# EAGLE board V0 (EAGLE 9.4.0), part 1 of 2
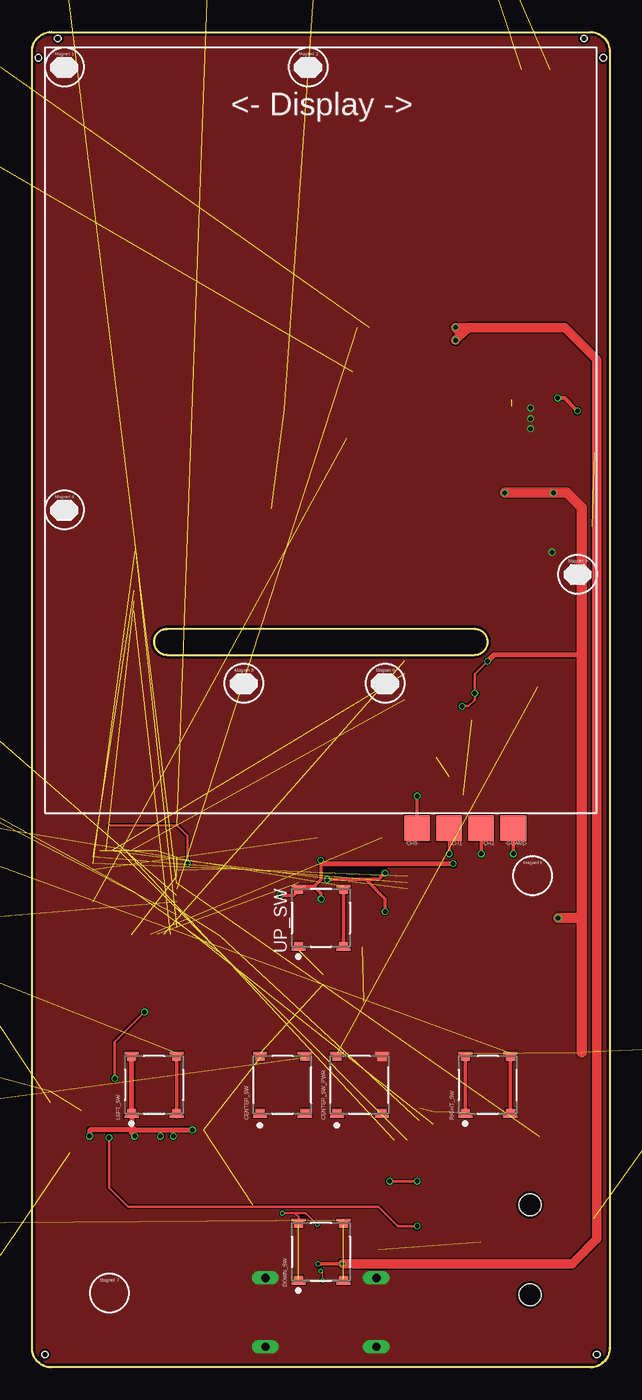
[diagram p0: board, top side]
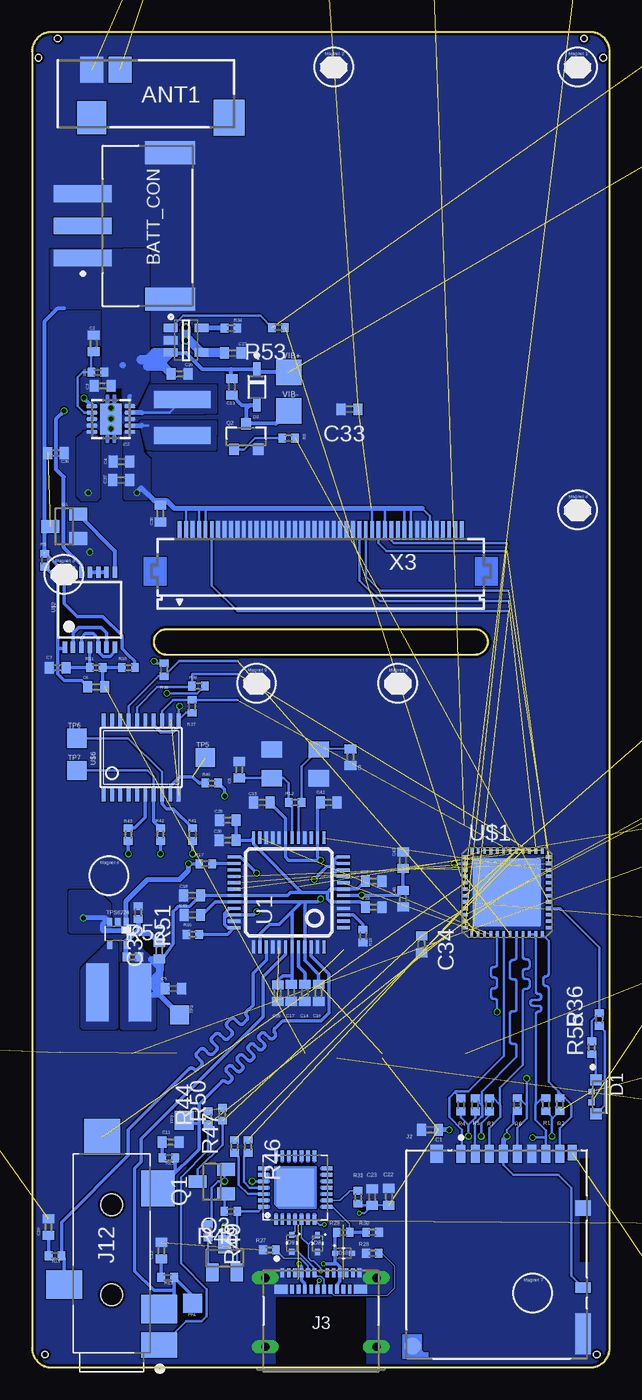
[diagram p1: board, bottom side, seen from below]

Size 45 x 104 mm. Coordinates in mm from the lower left corner, seen from the top.
Outline: 43.5,104 arc-90 45,102.5 45,1.5 arc-90 43.5,0 1.5,0 arc-90 0,1.5 0,102.5 arc-90 1.5,104 43.5,104
Outline: 10.5,55.5 34.5,55.5 arc90 35.5,56.5 arc90 34.5,57.5 10.5,57.5 arc90 9.5,56.5 arc90 10.5,55.5
Copper layers (1*16): Top 0.035mm / dielectric 1.5mm / Bottom 0.035mm
Design rules "jlcpcb": minimum track width 3.5mil, minimum drill 0.2mm, track to track 3.5mil, track to pad 3.5mil, pad to pad 6mil, via to via 6mil, smd to smd 6mil, copper to edge 0.2mm, drill to drill 0.2mm, minimum pad ring 3mil, minimum via ring 3mil, stop-mask expansion 4mil, vias tented up to drill 0mil, thermal gap 10mil
Holes 0.5 mm at 44,1 1,1 0.5,102 44.5,102 2,103.5 43,103.5

## Footprints (pad centres in the part's own frame; a part is rotated, then mirrored left to right if it is on the bottom)
PRO-OB-440_1 = smd 2 x 1.8: 1 1.865,-2.65; 2 1.865,-4.85 | smd 2.6 x 2.25: 3 -1.865,-2.65 | smd 2.8 x 2.45: 4 -1.865,-13.35
JST_S3B-XH-SM4-TB_0 = smd 1.3 x 4.5: 1 -2.5,5.05; 2 0,5.05; 3 2.5,5.05 | smd 1.8 x 3.9: 4 -5.7,-1.75; 5 5.7,-1.75
C0402 = smd 0.7 x 0.9: 1 -0.65,0; 2 0.65,0
C0201 = smd 0.25 x 0.35: 1 -0.25,0; 2 0.25,0
E-SWITCH_TL3315NF100Q_0 = smd 0.5 x 0.7: 1 -2.125,1.75; 2 2.125,1.75; 3 -2.125,-1.75; 4 2.125,-1.75 | smd 0.2 x 1.1: 1-2 -2.475,1.75; 2-2 2.475,1.75; 3-2 -2.475,-1.75; 4-2 2.475,-1.75
TP20SQ = smd 2 x 2: TP 0,0
BROADCOM_HSMF-C113_0 = smd 0.85 x 0.9: 1 -1.325,-0.25; 4 1.325,-0.25 | smd 0.45 x 0.5: 2 -0.425,-0.6; 3 0.425,-0.6
ON_SEMI_1N914BWS_0 = smd 1.05 x 0.55: 1 -1.4,0; 2 1.4,0
SOD-523 = smd 0.8 x 0.6: A 0,-0.8; K 0,0.8
ON_SEMICONDUCTOR_ESD5Z5.0T1G_0 = smd 0.48 x 0.4: 1 -0.66,0; 2 0.66,0
E-SWITCH_TL3315NF160Q_0 = smd 0.5 x 0.7: 1 -2.125,1.75; 2 2.125,1.75; 3 -2.125,-1.75; 4 2.125,-1.75 | smd 0.2 x 1.1: 1-2 -2.475,1.75; 2-2 2.475,1.75; 3-2 -2.475,-1.75; 4-2 2.475,-1.75
SOT23 = smd 1 x 1.4: 1 -0.95,-1.1; 2 0.95,-1.1; 3 0,1.1
DRC-S-PVSON-N10 = smd 0.28 x 0.85: 1 -1,-1.475; 2 -0.5,-1.475; 3 0,-1.475; 4 0.5,-1.475; 5 1,-1.475; 6 1,1.475; 7 0.5,1.475; 8 0,1.475; 9 -0.5,1.475; 10 -1,1.475 | smd 2.4 x 1.65: TH 0,0
HIROSE_DM3BT-DSF-PEJS_0 = smd 0.7 x 1.4: 1 -2.775,7.825; 2 -1.675,7.825; 3 -0.575,7.825; 4 0.525,7.825; 5 1.625,7.825; 6 2.725,7.825; 7 3.825,7.825; 8 4.925,7.825 | smd 0.7 x 1.2: 9 5.875,7.925 | smd 1.2 x 0.8: 10 6.725,-2.575 | smd 1 x 1.4: 11 -4.675,7.825 | smd 1.2 x 1.2: 12 6.725,3.625 | smd 1.311 x 1.311: 13 -6.553,-7.116 | smd 1.2 x 3.2: 14 6.725,-6.175
MOLEX_105450-0101_0 = drill 0.635 pad 1.067 long: 1 -4.32,3.36; 2 4.32,3.36; 3 -4.32,-2; 4 4.32,-2 | smd 0.3 x 0.7: A1 -3,3.77; A2 -2.5,3.77; A3 -2,3.77; A4 -1.5,3.77; A5 -1,3.77; A6 -0.5,3.77; A7 0.5,3.77; A8 1,3.77; A9 1.5,3.77; A10 2,3.77; A11 2.5,3.77; A12 3,3.77; B2 2.25,2.47; B3 1.75,2.47; B4 1.25,2.47; B5 0.75,2.47; B6 0.25,2.47; B7 -0.25,2.47; B8 -0.75,2.47; B9 -1.25,2.47; B10 -1.75,2.47; B11 -2.25,2.47 | smd 1 x 0.7: B1 3.1,2.47; B12 -3.1,2.47
CUI_SJ-43515TS-SMT = smd 2 x 2.8: 1 -7.15,-3.7 | smd 2.8 x 2.6: 2 5.05,-3.6 | smd 2.2 x 2.8: 3 -2.45,3.7; 4 -4.35,-3.7 | smd 2.8 x 2.8: 5 9.05,0.75 | hole 1.7: -3.25,0; 3.75,0
QFN28 = smd 2.9 x 2.9: P$0 0,0 | smd 0.8 x 0.3: P$1 -2.5,1.5; P$2 -2.5,1; P$3 -2.5,0.5; P$4 -2.5,0; P$5 -2.5,-0.5; P$6 -2.5,-1; P$7 -2.5,-1.5; P$15 2.5,-1.5; P$16 2.5,-1; P$17 2.5,-0.5; P$18 2.5,0; P$19 2.5,0.5; P$20 2.5,1; P$21 2.5,1.5 | smd 0.3 x 0.8: P$8 -1.5,-2.5; P$9 -1,-2.5; P$10 -0.5,-2.5; P$11 0,-2.5; P$12 0.5,-2.5; P$13 1,-2.5; P$14 1.5,-2.5; P$22 1.5,2.5; P$23 1,2.5; P$24 0.5,2.5; P$25 0,2.5; P$26 -0.5,2.5; P$27 -1,2.5; P$31 -1.5,2.5
ON_SEMI_MMBT5551LT1G_0 = smd 0.9 x 0.8: 1 -1,0.95; 2 -1,-0.95; 3 1,0
R0402 = smd 0.6 x 0.7: 1 -0.5,0; 2 0.5,0
TP15SQ = smd 1.5 x 1.5: TP 0,0
TSP62240 = smd 0.4 x 0.7: 1 -0.65,-0.85; 2 0,-0.85; 3 0.65,-0.85; 4 0.65,0.85; 5 -0.65,0.85
LQFP48 = smd 0.25 x 1: 1 -2.75,-4.25; 2 -2.25,-4.25; 3 -1.75,-4.25; 4 -1.25,-4.25; 5 -0.75,-4.25; 6 -0.25,-4.25; 7 0.25,-4.25; 8 0.75,-4.25; 9 1.25,-4.25; 10 1.75,-4.25; 11 2.25,-4.25; 12 2.75,-4.25; 25 2.75,4.25; 26 2.25,4.25; 27 1.75,4.25; 28 1.25,4.25; 29 0.75,4.25; 30 0.25,4.25; 31 -0.25,4.25; 32 -0.75,4.25; 33 -1.25,4.25; 34 -1.75,4.25; 35 -2.25,4.25; 36 -2.75,4.25 | smd 1 x 0.25: 13 4.25,-2.75; 14 4.25,-2.25; 15 4.25,-1.75; 16 4.25,-1.25; 17 4.25,-0.75; 18 4.25,-0.25; 19 4.25,0.25; 20 4.25,0.75; 21 4.25,1.25; 22 4.25,1.75; 23 4.25,2.25; 24 4.25,2.75; 37 -4.25,2.75; 38 -4.25,2.25; 39 -4.25,1.75; 40 -4.25,1.25; 41 -4.25,0.75; 42 -4.25,0.25; 43 -4.25,-0.25; 44 -4.25,-0.75; 45 -4.25,-1.25; 46 -4.25,-1.75; 47 -4.25,-2.25; 48 -4.25,-2.75
MICROCHIP_MCP73831T-2ATI-OT_1 = smd 1.1 x 0.65: 1 -1.2,0.95; 2 -1.2,0; 3 -1.2,-0.95; 4 1.2,-0.95; 5 1.2,0.95
QFN48 = smd 0.55 x 0.3: 1 -3.275,2.75; 2 -3.275,2.25; 3 -3.275,1.75; 4 -3.275,1.25; 5 -3.275,0.75; 6 -3.275,0.25; 7 -3.275,-0.25; 8 -3.275,-0.75; 9 -3.275,-1.25; 10 -3.275,-1.75; 11 -3.275,-2.25; 12 -3.275,-2.75; 25 3.275,-2.75; 26 3.275,-2.25; 27 3.275,-1.75; 28 3.275,-1.25; 29 3.275,-0.75; 30 3.275,-0.25; 31 3.275,0.25; 32 3.275,0.75; 33 3.275,1.25; 34 3.275,1.75; 35 3.275,2.25; 36 3.275,2.75 | smd 0.3 x 0.55: 13 -2.75,-3.275; 14 -2.25,-3.275; 15 -1.75,-3.275; 16 -1.25,-3.275; 17 -0.75,-3.275; 18 -0.25,-3.275; 19 0.25,-3.275; 20 0.75,-3.275; 21 1.25,-3.275; 22 1.75,-3.275; 23 2.25,-3.275; 24 2.75,-3.275; 37 2.75,3.275; 38 2.25,3.275; 39 1.75,3.275; 40 1.25,3.275; 41 0.75,3.275; 42 0.25,3.275; 43 -0.25,3.275; 44 -0.75,3.275; 45 -1.25,3.275; 46 -1.75,3.275; 47 -2.25,3.275; 48 -2.75,3.275 | smd 5.309 x 5.309: EXP 0,0
TSSOP14 = smd 0.35 x 0.9: 1 -1.95,-2.925; 2 -1.3,-2.925; 3 -0.65,-2.925; 4 0,-2.925; 5 0.65,-2.925; 6 1.3,-2.925; 7 1.95,-2.925; 8 1.95,2.925; 9 1.3,2.925; 10 0.65,2.925; 11 0,2.925; 12 -0.65,2.925; 13 -1.3,2.925; 14 -1.95,2.925
INDUCTOR = smd 1.3 x 4.4: P$1 -1.5,0.2; P$2 1.3,0.2
ECSCRYSTAL = smd 1.6 x 1.25: GND -1.83,1.12; GND2 1.84,-1.11; IN/OUT 1.82,1.12; IN/OUT2 -1.83,-1.11
INDUCTOR' = smd 1.75 x 4.5: P$1 -1.4,0.2; P$2 1.9,0.2
TSSOP20 = smd 0.305 x 0.991: 1 -2.925,-2.918; 2 -2.275,-2.918; 3 -1.625,-2.918; 4 -0.975,-2.918; 5 -0.325,-2.918; 6 0.325,-2.918; 7 0.975,-2.918; 8 1.625,-2.918; 9 2.275,-2.918; 10 2.925,-2.918; 11 2.925,2.918; 12 2.275,2.918; 13 1.625,2.918; 14 0.975,2.918; 15 0.325,2.918; 16 -0.325,2.918; 17 -0.975,2.918; 18 -1.625,2.918; 19 -2.275,2.918; 20 -2.925,2.918
FH12-45S-0.5SH = smd 0.3 x 1.3: 1 -13,3.25; 2 -12.5,3.25; 3 -12,3.25; 4 -11.5,3.25; 5 -11,3.25; 6 -10.5,3.25; 7 -10,3.25; 8 -9.5,3.25; 9 -9,3.25; 10 -8.5,3.25; 11 -8,3.25; 12 -7.5,3.25; 13 -7,3.25; 14 -6.5,3.25; 15 -6,3.25; 16 -5.5,3.25; 17 -5,3.25; 18 -4.5,3.25; 19 -4,3.25; 20 -3.5,3.25; 21 -3,3.25; 22 -2.5,3.25; 23 -2,3.25; 24 -1.5,3.25; 25 -1,3.25; 26 -0.5,3.25; 27 0,3.25; 28 0.5,3.25; 29 1,3.25; 30 1.5,3.25; 31 2,3.25; 32 2.5,3.25; 33 3,3.25; 34 3.5,3.25; 35 4,3.25; 36 4.5,3.25; 37 5,3.25; 38 5.5,3.25; 39 6,3.25; 40 6.5,3.25; 41 7,3.25; 42 7.5,3.25; 43 8,3.25; 44 8.5,3.25; 45 9,3.25

## Placement (x,y rotation side)
ANT1  PRO-OB-440  [PRO-OB-440_1]  43,99.2 90 bottom
BATT_CON  JST_S3B-XH-SM4-TBJST_S3B-XH-SM4-TB_0_0  [JST_S3B-XH-SM4-TB_0]  36,88.91 90 bottom
C1  50uF  [C0402]  14,18.5 180 bottom
C2  .1uF  [C0402]  40.2,79.75 90 bottom
C3  10uF  [C0402]  39.5,76.44 180 bottom
C4  10uF  [C0402]  38.04,70.55 180 bottom
C5  10 uF  [C0402]  34,29.5 0 bottom
C6  1uF  [C0402]  40,53 180 bottom
C7  1uF  [C0402]  43,54.5 0 bottom
C8  33pF  [C0402]  28.86,46.54 270 bottom
C9  33pF  [C0402]  20.19,47.53 90 bottom
C10  10nF  [C0402]  43.73,10.92 90 bottom
C11  10nF  [C0402]  34.21,17.54 0 bottom
C12  47nF  [C0402]  34.93,9.09 90 bottom
C13  0.1 uF  [C0402]  29.43,76.36 270 bottom
C14  1uF  [C0402]  23.74,29.17 270 bottom
C15  100nF  [C0402]  27.1,44 180 bottom
C16  100nF  [C0402]  22.68,29.17 270 bottom
C17  100nF  [C0402]  24.8,29.17 270 bottom
C18  100nF  [C0402]  32.53,36.76 180 bottom
C19  100nF  [C0402]  18.38,35.85 0 bottom
C20  100nF  [C0402]  18.38,37.87 0 bottom
C21  0.1uF  [C0402]  -38.5,32 180 top  (outside the outline)
C22  4.7uF  [C0402]  17.2,13.28 90 bottom
C23  0.1uF  [C0402]  18.5,13.27 90 bottom
C24  4.7uF  [C0402]  -146.5,167 90 top  (outside the outline)
C25  0.1uF  [C0402]  -138.5,167 90 top  (outside the outline)
C26  4.7uF  [C0402]  33.5,77.39 0 bottom
C27  4.7uF  [C0402]  29.36,79 0 bottom
C28  10uF  [C0402]  29.76,42.61 180 bottom
C29  10uF  [C0402]  25.87,29.16 270 bottom
C30  2.7pF  [C0201]  11.5,158 90 top  (outside the outline)
C31  4.7pF  [C0201]  15.5,158 90 top  (outside the outline)
C32  10uF  [C0402]  53.98,25 0 bottom  (outside the outline)
C33  0.1uF  [C0402]  20.27,74.63 180 bottom
C34  0.1uF  [C0402]  14.66,32.94 270 bottom
C35  33pF  [C0402]  35.09,32.45 90 bottom
C36  100nF  [C0402]  43.15,71.21 0 bottom
C37  10uF  [C0402]  38.06,69.11 180 bottom
C38  0.1uF  [C0402]  35,66.5 270 bottom
C39  100nF  [C0402]  29.77,41.06 180 bottom
C40  100nF  [C0402]  16.1,36.5 270 bottom
C41  100nF  [C0402]  32.52,35.24 180 bottom
C42  100nF  [C0402]  21.89,44 0 bottom
C43  10uF  [C0402]  16.1,39.5 90 bottom
CENTER_SW  E-SWITCH_TL3315NF100QE-SWITCH_TL3315NF100Q_0_0  [E-SWITCH_TL3315NF100Q_0]  19.5,22 90 top
CENTER_SW_PWR  E-SWITCH_TL3315NF100QE-SWITCH_TL3315NF100Q_0_0  [E-SWITCH_TL3315NF100Q_0]  25.5,22 90 top
CH0  TPSQTP20SQ  [TP20SQ]  30,42 180 top
CH1  TPSQTP20SQ  [TP20SQ]  32.5,42 180 top
CH2  TPSQTP20SQ  [TP20SQ]  35,42 180 top
D1  BROADCOM_HSMF-C113BROADCOM_HSMF-C113_0_0  [BROADCOM_HSMF-C113_0]  0.81,21.06 270 bottom
D2  ON_SEMI_1N914BWSON_SEMI_1N914BWS_0_0  [ON_SEMI_1N914BWS_0]  27.49,76.36 270 bottom
D3  [SOD-523]  -37.5,43 180 top  (outside the outline)
D4  [SOD-523]  -37.5,47 180 top  (outside the outline)
D5  [SOD-523]  -37.5,51 180 top  (outside the outline)
D6  [SOD-523]  -37.5,55 180 top  (outside the outline)
D7  [SOD-523]  -37.5,59 180 top  (outside the outline)
D8  ON_SEMICONDUCTOR_ESD5Z5.0T1GON_SEMICONDUCTOR_ESD5Z5.0T1G_0_0  [ON_SEMICONDUCTOR_ESD5Z5.0T1G_0]  22.76,9.65 270 bottom
D9  ON_SEMICONDUCTOR_ESD5Z5.0T1GON_SEMICONDUCTOR_ESD5Z5.0T1G_0_0  [ON_SEMICONDUCTOR_ESD5Z5.0T1G_0]  24.77,9.67 270 bottom
D10  ON_SEMICONDUCTOR_ESD5Z5.0T1GON_SEMICONDUCTOR_ESD5Z5.0T1G_0_0  [ON_SEMICONDUCTOR_ESD5Z5.0T1G_0]  20.74,8.89 0 bottom
DOWN_SW  E-SWITCH_TL3315NF160QE-SWITCH_TL3315NF160Q_0_0  [E-SWITCH_TL3315NF160Q_0]  22.5,9 90 top
G1  APX809S-31SA  [SOT23]  42.5,65.5 90 bottom
GUARD  TPSQTP20SQ  [TP20SQ]  37.5,42 180 top
IC2  TPS6300  [DRC-S-PVSON-N10]  38.86,73.86 90 bottom
J2  HIROSE_DM3BT-DSF-PEJSHIROSE_DM3BT-DSF-PEJS_0_0  [HIROSE_DM3BT-DSF-PEJS_0]  8.8,8.8 0 bottom
J3  MOLEX_105450-0101MOLEX_105450-0101_0_0  [MOLEX_105450-0101_0]  22.5,3.6 0 bottom
J12  3.5mm TRRS Jack  [CUI_SJ-43515TS-SMT]  38.8,8.9 90 bottom
JL  CP2102N-A02-GQFN28  [QFN28]  24.5,14 90 bottom
LEFT_SW  E-SWITCH_TL3315NF160QE-SWITCH_TL3315NF160Q_0_0  [E-SWITCH_TL3315NF160Q_0]  9.5,22 90 top
Q1  [SOT23]  30.99,14.47 90 bottom
Q2  ON_SEMI_MMBT5551LT1GON_SEMI_MMBT5551LT1G_0_0  [ON_SEMI_MMBT5551LT1G_0]  28.32,72.5 90 bottom
Q3  [SOT23]  30,8.5 0 bottom
R1  10k  [R0402]  4.98,20.47 270 bottom
R2  10k  [R0402]  3.88,20.48 270 bottom
R3  100  [R0402]  39.88,77.5 0 bottom
R4  10k  [R0402]  11.57,20.45 270 bottom
R5  10k  [R0402]  10.47,20.45 270 bottom
R6  10k  [R0402]  7.19,20.48 270 bottom
R7  10k  [R0402]  9.38,20.45 270 bottom
R8  1.5K  [R0402]  25.01,72.38 180 bottom
R9  100k  [R0402]  44,62.87 90 bottom
R10  100k  [R0402]  37.5,54.5 0 bottom
R11  10M  [R0402]  40,54.5 180 bottom
R12  1M  [R0402]  24.5,44 0 bottom
R13  10  [R0402]  34.44,7 180 bottom
R14  20  [R0402]  43.21,8.7 180 bottom
R15  20  [R0402]  34.35,16.33 180 bottom
R16  100K  [R0402]  32.49,33.74 0 bottom
R17  100k  [R0402]  31.47,39.23 180 bottom
R18  100k  [R0402]  19.2,33.6 90 bottom
R19  155k  [R0402]  -38.5,-4 180 top  (outside the outline)
R20  75k  [R0402]  -38.5,1 180 top  (outside the outline)
R21  35k  [R0402]  -46.5,14.5 180 bottom  (outside the outline)
R22  15k  [R0402]  -38.5,11 180 top  (outside the outline)
R23  5k  [R0402]  -38.5,16 180 top  (outside the outline)
R24  50k  [R0402]  -38.5,28 180 top  (outside the outline)
R25  5k  [R0402]  -8,45.5 180 top  (outside the outline)
R26  10k  [R0402]  -38.5,23 180 top  (outside the outline)
R27  5.1k  [R0402]  26.51,9.14 180 bottom
R28  5.1k  [R0402]  18.49,8.88 180 bottom
R29  22.1k  [R0402]  20.76,10.51 180 bottom
R30  47.5k  [R0402]  18.47,10.53 180 bottom
R31  1k  [R0402]  19.59,13.25 270 bottom
R32  10k  [R0402]  -130,159.5 90 top  (outside the outline)
R33  5k  [R0402]  -126.5,165 90 top  (outside the outline)
R34  2k  [R0402]  29.5,80.94 0 bottom
R35  100  [R0402]  -93.5,165 90 top  (outside the outline)
R36  50  [R0402]  0.8,27.1 90 bottom
R37  4.7k  [R0402]  32.53,51.49 270 bottom
R38  4.7k  [R0402]  32.05,53.08 0 bottom
R39  4.7k  [R0402]  34.72,54.34 90 bottom
R40  10k  [R0402]  31,45.5 0 bottom
R41  10k  [R0402]  32.5,41.5 270 bottom
R42  10k  [R0402]  35,41.5 270 bottom
R43  10k  [R0402]  37.5,41.5 270 bottom
R44  10K  [R0402]  31.27,19.44 90 bottom
R45  50k  [R0402]  -3.5,159 90 top  (outside the outline)
R46  1k  [R0402]  28.18,17.21 270 bottom
R47  1k  [R0402]  29.22,17.21 90 bottom
R48  10k  [R0402]  29.51,12.14 180 bottom
R49  10k  [R0402]  31.3,10.64 270 bottom
R50  10k  [R0402]  30.17,19.72 90 bottom
R51  180k  [R0402]  36.73,35.43 270 bottom
R52  360k  [R0402]  37.16,31.96 0 bottom
R53  10k  [R0402]  25.8,81 180 bottom
R54  315k  [R0402]  -24.5,-23 0 top  (outside the outline)
R55  25  [R0402]  1.4,24.9 90 bottom
RIGHT_SW  E-SWITCH_TL3315NF160QE-SWITCH_TL3315NF160Q_0_0  [E-SWITCH_TL3315NF160Q_0]  35.5,22 90 top
TP1  TPSQTP15SQ  [TP15SQ]  25.5,158 90 top  (outside the outline)
TP2  TPSQTP15SQ  [TP15SQ]  33.5,27.45 270 bottom
TP3  TPSQTP15SQ  [TP15SQ]  33.16,19.24 90 bottom
TP4  TPSQTP15SQ  [TP15SQ]  32.5,5 180 bottom
TP5  TPSQTP15SQ  [TP15SQ]  31.5,47.5 0 bottom
TP6  TPSQTP15SQ  [TP15SQ]  41.5,49 0 bottom
TP7  TPSQTP15SQ  [TP15SQ]  41.5,46.5 0 bottom
TPS6224  TPS62240  [TSP62240]  38.31,33.81 180 bottom
U1  VS1053-L  [LQFP48]  25,37 90 bottom
U2  MICROCHIP_MCP73831T-2ATI-OTMICROCHIP_MCP73831T-2ATI-OT_0_1  [MICROCHIP_MCP73831T-2ATI-OT_1]  33,80 0 bottom
U$1  ESP32-PICO-D4  [QFN48]  8,37 0 bottom
U$2  TOSHIBA-NAND-GATE  [TSSOP14]  40.5,59 0 bottom
U$3  2.2uH  [INDUCTOR]  33.49,73.87 270 bottom
U$4  ECS12P88MHZ  [ECSCRYSTAL]  24.5,47 0 bottom
U$5  CR43NP-2R2MC  [INDUCTOR']  38.5,29 0 bottom
U$6  COMMS-AT42QT2120XU  [TSSOP20]  36.5,47.5 0 bottom
U$7  1.6nH  [R0402]  19.5,158 90 top  (outside the outline)
UP_SW  E-SWITCH_TL3315NF160QE-SWITCH_TL3315NF160Q_0_0  [E-SWITCH_TL3315NF160Q_0]  22.5,35 90 top
VIB+  TPSQTP20SQ  [TP20SQ]  25,77.5 0 bottom
VIB-  TPSQTP20SQ  [TP20SQ]  25,74.5 0 bottom
X3  FH12-45S-0.5SH  [FH12-45S-0.5SH]  20.5,62 0 bottom

## Library data of the parts
ANT1 = PRO-OB-440; DESCRIPTION: OnBoard SMD 2400 antenna; HEIGHT: mm; MANUFACTURER_NAME: Proant AB; MANUFACTURER_PART_NUMBER: PRO-OB-440
BATT_CON = JST-S3B-XH-SM4-TB; CENTROID_NOT_SPECIFIED: No; CURRENT: 3.0A; DATASHEET: https://upverter.com/datasheet/d0ef474b08262649b2e88d8de799d1feabfec59e.pdf; DIGIKEY_DESCRIPTION: CONN HEADER XH SMD 3POS 2.5MM; DIGIKEY_PART_NUMBER: 455-2263-1-ND; IMPORTED_FROM: octopart; LEAD_FREE: yes; MF: JST; MPN: S3B-XH-SM4-TB; NUM_PINS: 3; OCTOPART_PART_NUMBER: a0e069d6672e7f27; PACKAGE: HDR3; PREFIX: J; ROHS: yes; TEMPERATURE_RANGE_HIGH: +85°C; TEMPERATURE_RANGE_LOW: -25°C; VOLTAGE: 250V
C1-C43 = rcl; SPICEPREFIX: C
CENTER_SW CENTER_SW_PWR = E-Switch-TL3315NF100Q; CENTROID_NOT_SPECIFIED: No; CIRCUIT: SPST-NO; CONTACT_RATING_@_VOLTAGE: 0.05A @ 15VDC; DATASHEET: http://spec_sheets.e-switch.com/specs/P010336.pdf; DIGIKEY_DESCRIPTION: SWITCH Tactile Switch SPST-NO Top Actuated Surface Mount; DIGIKEY_PART_NUMBER: EG4620CT-ND; LEAD_FREE: yes; MF: E-Switch; MOUSER_PART_NUMBER: 612-TL3315NF100Q; MPN: TL3315NF100Q; PACKAGE: SMT_4POS; PREFIX: SW; ROHS: yes; TEMPERATURE_RANGE_HIGH: +70°C; TEMPERATURE_RANGE_LOW: -20°C
CH0 CH1 CH2 GUARD TP1-TP7 VIB+ VIB- = testpad
D1 = Broadcom-HSMF-C113; CENTROID_NOT_SPECIFIED: Yes; DATASHEET: https://docs.broadcom.com/docs/AV02-0611EN; DC_FORWARD_CURRENT: 20mA; DIGIKEY_DESCRIPTION: DIODE Red, Green, Blue (RGB) 626nm Red, 572nm Green, 470nm Blue LED Indication - Discrete 1.9V Red, 2V Green, 3.4V Blue 4-SMD, No Lead; DIGIKEY_PART_NUMBER: 516-2232-1-ND; LEAD_FREE: yes; MF: Broadcom; MOUSER_PART_NUMBER: 630-HSMF-C113; MPN: HSMF-C113; PACKAGE: SMT_LED_2MM5_1MM0; PREFIX: D; REVERSE_VOLTAGE: 5V; ROHS: yes; TEMPERATURE_RANGE_HIGH: +85°C; TEMPERATURE_RANGE_LOW: -40°C
D2 = ON_Semi-1N914BWS; CENTROID_NOT_SPECIFIED: No; CURRENT_-_AVERAGE_RECTIFIED_(IO): 150mA; DATASHEET: https://www.fairchildsemi.com/datasheets/1N/1N914BWS.pdf; DIGIKEY_DESCRIPTION: Diode Standard 75V 150mA Surface Mount SOD-323F; DIGIKEY_PART_NUMBER: 1N914BWSCT-ND; LEAD_FREE: yes; MF: ON Semi; MOUSER_PART_NUMBER: 512-1N914BWS; MPN: 1N914BWS; PACKAGE: SOD-323F2L; PREFIX: D; ROHS: yes; TEMPERATURE_RANGE_HIGH: +150°C; VOLTAGE_-_DC_REVERSE_(VR)_(MAX): 75V
D3-D7 = adafruit
D8-D10 = ESD-Diode_On-Semi-ESD5Z5.0T1G; CIIVA_IDS: 284485; COMPONENT_LINK_1_DESCRIPTION: Manufacturer URL; COMPONENT_LINK_1_URL: http://www.onsemi.com/; COMPONENT_LINK_3_DESCRIPTION: Package Specification; COMPONENT_LINK_3_URL: http://www.onsemi.com/pub_link/Collateral/502-01.PDF; DATASHEET: http://www.onsemi.cn/pub_link/Collateral/ESD5Z2.5T1-D.PDF; DATASHEET_VERSION: Rev. 10; DIRECTION: Unidirectional; FOOTPRINT_VARIANT_NAME_0: Manufacturer Recommended; IMPORTED: yes; IMPORTED_FROM: vault; IMPORT_TS: 1521842713; IR_MAX_UA: 0.05; MF: On Semiconductor; MOUNTING_TECHNOLOGY: Surface Mount; MPN: ESD5Z5.0T1G; NUMBER_OF_LINES: 1; PACKAGE: SOD-523-2-502-01; PACKAGE_DESCRIPTION: 2-Pin SOD, Body 1.2 x 0.8 mm; PACKAGE_VERSION: Rev. E, 09/2010; PACKING: Tape and Reel; PPK_MAX_W: 174; PREFIX: D; RELEASE_DATE: 1407165284; ROHS: No; VAULT_GUID: 2E60F141-7E89-4DCC-B1D9-9638F7D41C5F; VAULT_REVISION: 3E28F6AD-A77D-4A2F-8313-20A51EDFA349; VBR_MIN_V: 6.2; VRWM_MAX_V: 5
DOWN_SW UP_SW = E-Switch-TL3315NF160Q; CENTROID_NOT_SPECIFIED: No; DATASHEET: http://media.digikey.com/pdf/Data%20Sheets/E-Switch%20PDFs/TL3315.pdf; DIGIKEY_DESCRIPTION: SWITCH TACTILE SPST-NO 0.05A 15V; DIGIKEY_PART_NUMBER: EG4621CT-ND; LEAD_FREE: yes; MF: E-Switch; MOUSER_PART_NUMBER: 612-TL3315NF160Q; MPN: TL3315NF160Q; PACKAGE: SW_SMT_4MM5_4MM5; PREFIX: SW; ROHS: yes; TEMPERATURE_RANGE_HIGH: +70°C; TEMPERATURE_RANGE_LOW: -20°C
G1 = APX80xx
IC2 = texas; MPN: TPS63000DRCTG4; OC_FARNELL: 1511852; OC_NEWARK: 59M7217
J2 = microSD-socket-HIROSE-DM3BT-DSF-PEJS; CENTROID_NOT_SPECIFIED: No; CONN_ORIENTATION: Right Angle; CONTACT_MATERIAL: Gold; CURRENT_RATING: 0.5A; DATASHEET: https://www.hirose.com/product/en/download_file/key_name/DM3/category/Catalog/doc_file_id/49662/?file_category_id=4&item_id=195&is_series=1; DEVICE_CLASS_L1: Connectors; DEVICE_CLASS_L2: Memory Connectors; DEVICE_CLASS_L3: unset; DIGIKEY_DESCRIPTION: CONN MICRO SD CARD PUSH-PUSH R/A; DIGIKEY_PART_NUMBER: HR1942CT-ND; FOOTPRINT_URL: https://www.hirose.com/product/en/download_file/key_name/DM3BT-DSF-PEJS/category/Drawing%20(2D)/doc_file_id/44097/?file_category_id=6&item_id=06090029900&is_series=; HEIGHT: 2.38mm; IS_FEMALE: yes; LEAD_FREE: yes; MEMORY_TYPE: FLASH; MF: HIROSE; MFG_PACKAGE_IDENT: DM3BT-DSF-PEJS; MFG_PACKAGE_IDENT_DATE: 0; MFG_PACKAGE_IDENT_REV: 0; MOUSER_DESCRIPTION: Memory Card Connectors MICRO SD CD CONN REV SMT PUSHPUSH; MOUSER_PART_NUMBER: 798-DM3BT-DSF-PEJS; MPN: DM3BT-DSF-PEJS; NUMBER_OF_CONTACTS: 8; PACKAGE: CONN_SMT_MICROSD_13MM85_16MM05; PREFIX: J; ROHS: yes; SHIELDING: true; TEMPERATURE_RANGE_HIGH: +85°C; TEMPERATURE_RANGE_LOW: -25°C; VERIFICATION_VERSION: 0.0.0.1; VOLTAGE_RATING: 125V
J3 = USB-C_Molex-105450-0101; CENTROID_NOT_SPECIFIED: No; CONTACT_FINISH: Gold; CURRENT_RATING: 0.25A, 1A, 5A; DATASHEET: http://www.molex.com/pdm_docs/sd/1054500101_sd.pdf; DESCRIPTION: USB - C USB 3.1, Superspeed+ Receptacle Connector 24 Position Surface Mount, Right Angle; Through Hole; DIGIKEY_DESCRIPTION: CONN RCPT USB C 3.1 SMT R/A; DIGIKEY_PART_NUMBER: WM12856CT-ND; IS_FEMALE: yes; LEAD_FREE: yes; MATING_CYCLES: 10000; MF: Molex; MOUSER_PART_NUMBER: 538-105450-0101; MPN: 105450-0101; NUMBER_OF_PORTS: 1; PACKAGE: CONN_SMT_8MM94_7MM9_USB; PREFIX: J; ROHS: yes; SHIELDING: Shielded; TEMPERATURE_RANGE_HIGH: +85°C; TEMPERATURE_RANGE_LOW: -30°C; VOLTAGE_-_RATED: 30VAC/DC
J12 = TRRS-Jack-SJ-43515TS-SMT; AVAILABILITY: Unavailable; DESCRIPTION: 4 conductor 3.5 mm Surface Mount Audio Jack w/ Tip Switch; MF: CUI; MP: SJ-43515TS-SMT; PACKAGE: None; PRICE: None
JL = CP2102N-A02-GQFN28
LEFT_SW RIGHT_SW = E-Switch-TL3315NF160Q; CENTROID_NOT_SPECIFIED: No; DATASHEET: http://media.digikey.com/pdf/Data%20Sheets/E-Switch%20PDFs/TL3315.pdf; DIGIKEY_DESCRIPTION: SWITCH TACTILE SPST-NO 0.05A 15V; DIGIKEY_PART_NUMBER: EG4621CT-ND; LEAD_FREE: yes; MF: E-Switch; MOUSER_PART_NUMBER: 612-TL3315NF160Q; MPN: TL3315NF160Q; PACKAGE: SW_SMT_4MM5_4MM5; PREFIX: SW; ROHS: yes; SPICEPREFIX: E; TEMPERATURE_RANGE_HIGH: +70°C; TEMPERATURE_RANGE_LOW: -20°C
Q1 Q3 = semicon-smd-ipc
Q2 = ON_Semi-MMBT5551LT1G; 3DS_PART_NUMBER: 452-00001; CENTROID_NOT_SPECIFIED: No; COLLECTOR_BASE_VOLTAGE: 180V; COLLECTOR_EMITTER_BREAKDOWN_VOLTAGE: 160V; COLLECTOR_EMITTER_SATURATION_VOLTAGE: 0.2V; COLLECTOR_EMITTER_VOLTAGE: 160V; DATASHEET: http://www.onsemi.com/pub/Collateral/MMBT5550LT1-D.PDF; DEVICE_CLASS_L1: Discrete Semiconductors; DEVICE_CLASS_L2: Transistors; DEVICE_CLASS_L3: BJTs; DIGIKEY_DESCRIPTION: TRANS NPN 160V 0.6A SOT23; DIGIKEY_PART_NUMBER: MMBT5551LT1GOSCT-ND; EMITTER_BASE_VOLTAGE: 6V; FOOTPRINT_PARAMETERS_1: {"fp_type":"SOT23","params":{"N":{"default":"3","long name":"Number of leads","type":"multichoice","short name":"N"},"A":{"nom":1000000,"long name":"Height","min":890000,"max":1110000,"short name":"A","type":"measurement"},"A1":{"nom":60000,"long name":"Package clearance","min":10000,"max":100000,"short name":"A1","type":"measurement"},"A2":{"nom":940000,"long name":"Package height","min":880000,"max":1010000,"short name":"A2","type":"measurement"},"D":{"nom":2900000,"long name":"Package length","min":2800000,"max":3040000,"short name":"D","type":"measurement"},"E":{"nom":2400000,"long name":"Width /w leads","min":2100000,"max":2640000,"short name":"E","type":"measurement"},"E1":{"nom":1300000,"long name":"Package width","min":1200000,"max":1400000,"short name":"E1","type":"measurement"},"B":{"nom":440000,"long name":"Lead width","min":370000,"max":500000,"short name":"B","type":"measurement"},"C":{"nom":140000,"long name":"Lead thickness","min":80000,"max":200000,"short name":"C","type":"measurement"},"L":{"nom":430000,"long name":"Lead foot length","min":300000,"max":550000,"short name":"L","type":"measurement"},"e":{"nom":950000,"long name":"Lead pitch","min":null,"max":null,"short name":"e","type":"measurement"},"PHI":{"nom":false,"long name":"Lead angle","min":0,"max":10000000,"short name":"PHI","type":"measurement"},"offset x":{"nom":0,"long name":"X Center offset","min":null,"max":null,"short name":"offset x","type":"measurement"},"offset y":{"nom":0,"long name":"Y Center offset","min":null,"max":null,"short name":"offset y","type":"measurement"},"LS":{"default":"Rounded rectangle","long name":"Land shape","type":"multichoice","short name":"LS"},"LS1":{"default":"Rectangle","long name":"Land shape (Pin 1)","type":"multichoice","short name":"LS1"},"solder toe":{"nom":550000,"long name":"Solder fillet (toe)","min":null,"max":null,"short name":"solder toe","type":"fixedmeasurement"},"solder heel":{"nom":450000,"long name":"Solder fillet (heel)","min":null,"max":null,"short name":"solder heel","type":"fixedmeasurement"},"solder side":{"nom":50000,"long name":"Solder fillet (side)","min":null,"max":null,"short name":"solder side","type":"fixedmeasurement"},"courtyard":{"nom":500000,"long name":"Courtyard","min":null,"max":null,"short name":"courtyard","type":"fixedmeasurement"},"SF":{"default":"A","long name":"Packing level","type":"multichoiceparent","short name":"SF","help":"http://support.upverter.com/customer/portal/articles/978783-what-is-a-footprint-packing-level","children":["solder toe","solder heel","solder side","courtyard"]}}}; FOOTPRINT_PARAMETERS_2: {"fp_type":"SOT23","params":{"N":{"default":"3","long name":"Number of leads","type":"multichoice","short name":"N"},"A":{"nom":1000000,"long name":"Height","min":890000,"max":1110000,"short name":"A","type":"measurement"},"A1":{"nom":60000,"long name":"Package clearance","min":10000,"max":100000,"short name":"A1","type":"measurement"},"A2":{"nom":940000,"long name":"Package height","min":880000,"max":1010000,"short name":"A2","type":"measurement"},"D":{"nom":2900000,"long name":"Package length","min":2800000,"max":3040000,"short name":"D","type":"measurement"},"E":{"nom":2400000,"long name":"Width /w leads","min":2100000,"max":2640000,"short name":"E","type":"measurement"},"E1":{"nom":1300000,"long name":"Package width","min":1200000,"max":1400000,"short name":"E1","type":"measurement"},"B":{"nom":440000,"long name":"Lead width","min":370000,"max":500000,"short name":"B","type":"measurement"},"C":{"nom":140000,"long name":"Lead thickness","min":80000,"max":200000,"short name":"C","type":"measurement"},"L":{"nom":430000,"long name":"Lead foot length","min":300000,"max":550000,"short name":"L","type":"measurement"},"e":{"nom":950000,"long name":"Lead pitch","min":null,"max":null,"short name":"e","type":"measurement"},"PHI":{"nom":false,"long name":"Lead angle","min":0,"max":10000000,"short name":"PHI","type":"measurement"},"offset x":{"nom":0,"long name":"X Center offset","min":null,"max":null,"short name":"offset x","type":"measurement"},"offset y":{"nom":0,"long name":"Y Center offset","min":null,"max":null,"short name":"offset y","type":"measurement"},"LS":{"default":"Rounded rectangle","long name":"Land shape","type":"multichoice","short name":"LS"},"LS1":{"default":"Rectangle","long name":"Land shape (Pin 1)","type":"multichoice","short name":"LS1"},"solder toe":{"nom":350000,"long name":"Solder fillet (toe)","min":null,"max":null,"short name":"solder toe","type":"fixedmeasurement"},"solder heel":{"nom":350000,"long name":"Solder fillet (heel)","min":null,"max":null,"short name":"solder heel","type":"fixedmeasurement"},"solder side":{"nom":30000,"long name":"Solder fillet (side)","min":null,"max":null,"short name":"solder side","type":"fixedmeasurement"},"courtyard":{"nom":250000,"long name":"Courtyard","min":null,"max":null,"short name":"courtyard","type":"fixedmeasurement"},"SF":{"default":"B","long name":"Packing level","type":"multichoiceparent","short name":"SF","help":"http://support.upverter.com/customer/portal/articles/978783-what-is-a-footprint-packing-level","children":["solder toe","solder heel","solder side","courtyard"]}}}; FOOTPRINT_PARAMETERS_3: {"fp_type":"SOT23","params":{"N":{"default":"3","long name":"Number of leads","type":"multichoice","short name":"N"},"A":{"nom":1000000,"long name":"Height","min":890000,"max":1110000,"short name":"A","type":"measurement"},"A1":{"nom":60000,"long name":"Package clearance","min":10000,"max":100000,"short name":"A1","type":"measurement"},"A2":{"nom":940000,"long name":"Package height","min":880000,"max":1010000,"short name":"A2","type":"measurement"},"D":{"nom":2900000,"long name":"Package length","min":2800000,"max":3040000,"short name":"D","type":"measurement"},"E":{"nom":2400000,"long name":"Width /w leads","min":2100000,"max":2640000,"short name":"E","type":"measurement"},"E1":{"nom":1300000,"long name":"Package width","min":1200000,"max":1400000,"short name":"E1","type":"measurement"},"B":{"nom":440000,"long name":"Lead width","min":370000,"max":500000,"short name":"B","type":"measurement"},"C":{"nom":140000,"long name":"Lead thickness","min":80000,"max":200000,"short name":"C","type":"measurement"},"L":{"nom":430000,"long name":"Lead foot length","min":300000,"max":550000,"short name":"L","type":"measurement"},"e":{"nom":950000,"long name":"Lead pitch","min":null,"max":null,"short name":"e","type":"measurement"},"PHI":{"nom":false,"long name":"Lead angle","min":0,"max":10000000,"short name":"PHI","type":"measurement"},"offset x":{"nom":0,"long name":"X Center offset","min":null,"max":null,"short name":"offset x","type":"measurement"},"offset y":{"nom":0,"long name":"Y Center offset","min":null,"max":null,"short name":"offset y","type":"measurement"},"LS":{"default":"Rounded rectangle","long name":"Land shape","type":"multichoice","short name":"LS"},"LS1":{"default":"Rectangle","long name":"Land shape (Pin 1)","type":"multichoice","short name":"LS1"},"solder toe":{"nom":150000,"long name":"Solder fillet (toe)","min":null,"max":null,"short name":"solder toe","type":"fixedmeasurement"},"solder heel":{"nom":250000,"long name":"Solder fillet (heel)","min":null,"max":null,"short name":"solder heel","type":"fixedmeasurement"},"solder side":{"nom":10000,"long name":"Solder fillet (side)","min":null,"max":null,"short name":"solder side","type":"fixedmeasurement"},"courtyard":{"nom":100000,"long name":"Courtyard","min":null,"max":null,"short name":"courtyard","type":"fixedmeasurement"},"SF":{"default":"C","long name":"Packing level","type":"multichoiceparent","short name":"SF","help":"http://support.upverter.com/customer/portal/articles/978783-what-is-a-footprint-packing-level","children":["solder toe","solder heel","solder side","courtyard"]}}}; FOOTPRINT_URL: http://www.onsemi.com/pub/Collateral/318-08.PDF; FOOTPRINT_VARIANT_NAME_0: Recommended_Land_Pattern; FOOTPRINT_VARIANT_NAME_1: IPC_A; FOOTPRINT_VARIANT_NAME_2: IPC_B; FOOTPRINT_VARIANT_NAME_3: IPC_C; HEIGHT: 1.11mm; HFE_MIN: 80; IPC_LAND_PATTERN_NAME: SOT95P240X100-3; LEAD_FREE: yes; MAX_COLLECTOR_CURRENT: 600mA; MAX_JUNCTION_TEMP: +150°C; MF: ON Semi; MFG_PACKAGE_IDENT: 318-08; MFG_PACKAGE_IDENT_DATE: 01/2018; MFG_PACKAGE_IDENT_REV: AS; MOUSER_PART_NUMBER: 863-MMBT5551LT1G; MPN: MMBT5551LT1G; NUMBER_OF_ELEMENTS: 1; NUMBER_OF_NPN: 1; NUMBER_OF_PNP: 0; PACKAGE: SOT-23 (TO-236); POWER_DISSIPATION: 225mW; PREFIX: Q; ROHS: yes; STANDOFF_HEIGHT: 0.01mm; TEMPERATURE_RANGE_HIGH: +150°C; TEMPERATURE_RANGE_LOW: -55°C; VERIFICATION_VERSION: 0.0.0.1
R1-R55 = rcl; SPICEPREFIX: R
TPS6224 = TPS62240
U1 = vlsi-web-e7
U2 = Microchip-MCP73831T-2ATI; CIIVA_IDS: 961386; CODE__IPC: SOT23-5; DATASHEET_VERSION: revE, Sep-2008; FOOTPRINT_VARIANT_NAME_0: Level C; FOOTPRINT_VARIANT_NAME_1: Level B; FOOTPRINT_VARIANT_NAME_2: Level A; IMPORTED: yes; IMPORTED_FROM: vault; IMPORT_TS: 1521858219; MF: Microchip; MPN: MCP73831T-2ATI/OT; PACKAGE: SOT-23-OT5; PACKAGE_DESCRIPTION: 5-Lead Plastic Small Outline Transistor (OT) [SOT-23]; PACKAGE_VERSION: revBB, Aug-2009; PREFIX: U; RELEASE_DATE: 1300334172; VAULT_GUID: 2E16BB74-376E-4BA5-8468-379BB32F6F4F; VAULT_REVISION: 08CA403F-6CAA-4AD2-9BA5-F14A59377F17
U$1 = ESP32
U$2 = TOSHIBA_NAND-GATE
U$3 = VLF4012
U$4 = Crystal
U$5 = CR43NP-4R7MC
U$6 = AT42QT2120
U$7 = L-0402
X3 = con-hirose; OC_FARNELL: unknown; OC_NEWARK: unknown

## Nets
ATQ_CHANGE: R39.1 U$1.14 U$6.17
BLUE_GREEN_LED_CATH: R36.2 R55.2 U$1.28
BUTTON_ADC: R19.1 R20.1 R21.1 R22.1 R23.1 R25.2 R54.1 U$1.10
BUTTON_DIN: C21.2 R24.2 U$1.8
CARD_DETECT: J2.9 R54.2
CENTER_SW_PWR_TOP: C6.1 CENTER_SW_PWR.2 CENTER_SW_PWR.2-2 R10.1 R11.1
CHARGE_DETECT: R53.1 U$1.6
CHR0: JL.P$15
CHR1: JL.P$14
CHREN: JL.P$13
CP_RSTB: JL.P$9 R31.1
DISPLAY_CS: U$1.12 X3.34
DISPLAY_RST: U$1.13 X3.6
DREQ: U1.8 U$1.15
DSR: JL.P$27
DTR: JL.P$31 Q3.2 R48.1
EN: C34.1 Q1.3 R50.1 U$1.9
GND: ANT1.1 BATT_CON.3 BATT_CON.4 BATT_CON.5 C1.2 C2.2 C3.2 C4.2 C5.2 C7.1 C8.1 C9.1 C10.2 C11.2 C12.2 C14.2 C15.2 C16.2 C17.2 C18.2 C19.2 C20.2 C22.2 C23.2 C24.2 C25.2 C26.2 C27.2 C28.2 C29.2 C30.2 C31.2 C32.2 C33.2 C34.2 C36.2 C37.2 C38.2 C39.2 C40.2 C41.2 C42.2 C43.2 CENTER_SW_PWR.4 CENTER_SW_PWR.4-2 D8.2 D9.2 D10.2 G1.1 IC2.3 IC2.9 IC2.TH J2.6 J2.11 J2.12 J2.13 J2.14 J3.1 J3.2 J3.3 J3.4 J3.A1 J3.A12 J3.B1 J3.B12 JL.P$0 JL.P$3 Q2.2 R16.1 R18.1 R25.1 R26.1 R27.2 R28.2 R30.1 R32.1 R34.2 R45.2 R51.1 TPS6224.2 U1.4 U1.16 U1.20 U1.21 U1.22 U1.35 U1.37 U1.40 U1.41 U1.47 U2.2 U$1.EXP U$2.13 U$4.GND U$4.GND2 U$6.10 U$6.12 X3.3 X3.7 X3.8 X3.9 X3.10 X3.11 X3.12 X3.13 X3.14 X3.15 X3.16 X3.17 X3.18 X3.19 X3.20 X3.21 X3.22 X3.23 X3.24 X3.25 X3.26 X3.27 X3.28 X3.38 X3.39 X3.41
I2C_SCL: R38.1 U$1.39 U$6.16
I2C_SDA: R37.1 U$1.42 U$6.13
IO2: J2.7 Q3.3 R1.1 U$1.22 U$1.23
IO4: J2.8 R2.1 U$1.24
IO12: J2.1 R4.1 U$1.18
IO13: J2.2 R5.1 U$1.20
IO14: J2.5 R6.1 U$1.17
IO15: J2.3 R7.1 U$1.21
N$1: C13.2 D2.2 Q2.3 VIB-.TP
N$2: D1.1 R55.1
N$3: C2.1 IC2.7 IC2.8 R3.1
N$4: C8.2 R12.1 U1.18 U$4.IN/OUT2
N$5: C6.2 R9.1 U$2.1
N$6: IC2.2 U$3.P$2
N$8: IC2.4 U$3.P$1
N$10: TPS6224.4 U$5.P$1
N$11: R40.1 TP5.TP U$6.9
N$12: U$2.3 U$2.5 U$2.7
N$14: C7.2 R11.2 U$2.4
N$16: D4.A R20.2 UP_SW.3 UP_SW.3-2 UP_SW.4 UP_SW.4-2
N$18: CH1.TP R41.2
N$19: U$2.2 U$2.6
N$20: CH2.TP R42.2
N$21: C9.2 R12.2 U1.17 U$4.IN/OUT
N$22: Q2.1 R8.2
N$23: R41.1 TP6.TP U$6.8
N$24: D5.A R21.2 RIGHT_SW.3 RIGHT_SW.3-2 RIGHT_SW.4 RIGHT_SW.4-2
N$25: R42.1 TP7.TP U$6.7
N$26: R43.1 U$6.6
N$27: R17.1 U1.26
N$28: D6.A DOWN_SW.3 DOWN_SW.3-2 DOWN_SW.4 DOWN_SW.4-2 R22.2
N$29: CENTER_SW.4 CENTER_SW.4-2 D7.A R23.2
N$30: ANT1.2 C30.1 U$7.1
N$31: C31.1 U$1.2 U$7.2
N$32: D3.K D4.K D5.K D6.K D7.K R24.1 R26.2
N$33: U$2.9 U$2.10 U$2.11
N$34: C12.1 R13.2
N$35: C10.1 R14.2
N$36: C11.1 R15.2
N$37: CH0.TP R40.2
N$38: R16.2 U1.9 U1.10 U1.11 U1.12 U1.25 U1.33 U1.34 U1.36
N$39: C14.1 U1.44
N$40: GUARD.TP R43.2
N$41: R18.2 U1.3
N$42: C35.2 R51.2 R52.1 TPS6224.5
N$43: G1.2 U$2.8
N$46: D3.A LEFT_SW.3 LEFT_SW.3-2 LEFT_SW.4 LEFT_SW.4-2 R19.2
N$48: J12.4 R13.1 TP4.TP U1.42
N$49: J12.3 R14.1 U1.39
N$50: J3.A5 R27.1
N$51: J3.B5 R28.1
N$52: JL.P$8 R29.1 R30.2
N$54: R34.1 U2.5
N$55: D1.3 R35.1
N$56: D1.4 R36.1
N$57: J12.2 R15.1 TP3.TP U1.46
N$58: Q1.1 R48.2
N$59: Q3.1 R49.2
RED_LED_CATH: R35.2 R53.2 U2.1
RTS: JL.P$24 Q1.2 R49.1
RXD: JL.P$25 R46.2
RXD0: R47.2 U$1.40
SPI_CLK: U1.28 U$1.35 X3.32
SPI_MISO: U1.30 U$1.38 X3.29
SPI_MOSI: U1.29 U$1.36 X3.30
SYS_ENABLE: IC2.6 U$2.12
TRRS_INLINE_CTRL: J12.1 R44.1 U$1.11
TRRS_TIP_SW: J12.5 R45.1 U$1.5
TXD: JL.P$26 R47.1
TXD0: R46.1 U$1.41
USB_D+: D9.1 J3.A6 J3.B6 JL.P$4
USB_D-: D8.1 J3.A7 J3.B7 JL.P$5
V1P8: C5.1 C18.1 C19.1 C20.1 C28.1 C35.1 C39.1 R52.2 TP2.TP U1.5 U1.7 U1.24 U1.31 U$5.P$2
V3P3: C1.1 C4.1 C15.1 C16.1 C17.1 C21.1 C22.1 C23.1 C24.1 C25.1 C29.1 C32.1 C33.1 C37.1 C38.1 C40.1 C41.1 C42.1 C43.1 CENTER_SW.2 CENTER_SW.2-2 D1.2 DOWN_SW.1 DOWN_SW.1-2 DOWN_SW.2 DOWN_SW.2-2 IC2.1 IC2.10 J2.4 J2.10 JL.P$6 JL.P$7 LEFT_SW.1 LEFT_SW.1-2 LEFT_SW.2 LEFT_SW.2-2 R1.2 R2.2 R4.2 R5.2 R6.2 R7.2 R17.2 R31.2 R37.2 R38.2 R39.2 R44.2 R50.2 RIGHT_SW.1 RIGHT_SW.1-2 RIGHT_SW.2 RIGHT_SW.2-2 TP1.TP TPS6224.1 TPS6224.3 U1.6 U1.14 U1.19 U1.32 U1.38 U1.43 U1.45 U$1.1 U$1.3 U$1.4 U$1.19 U$1.37 U$1.43 U$1.46 U$6.11 U$6.14 UP_SW.1 UP_SW.1-2 UP_SW.2 UP_SW.2-2 X3.2 X3.4 X3.5 X3.31 X3.33 X3.36 X3.37 X3.40
VBAT: BATT_CON.1 C3.1 C13.1 C26.1 C36.1 D2.1 G1.3 IC2.5 R3.2 R9.2 R10.2 R33.2 U2.3 U$2.14 VIB+.TP
VBAT_ADC_IN: R32.2 R33.1 U$1.7
VBUS: C27.1 D10.1 J3.A4 J3.A9 J3.B4 J3.B9 R29.2 U2.4
VIB_MOTOR: R8.1 U$1.29
VS_CMD_CS: U1.23 U$1.16
VS_DATA_CS: U1.13 U$1.34